# EAGLE board PCB v51 (EAGLE 9.7.0)
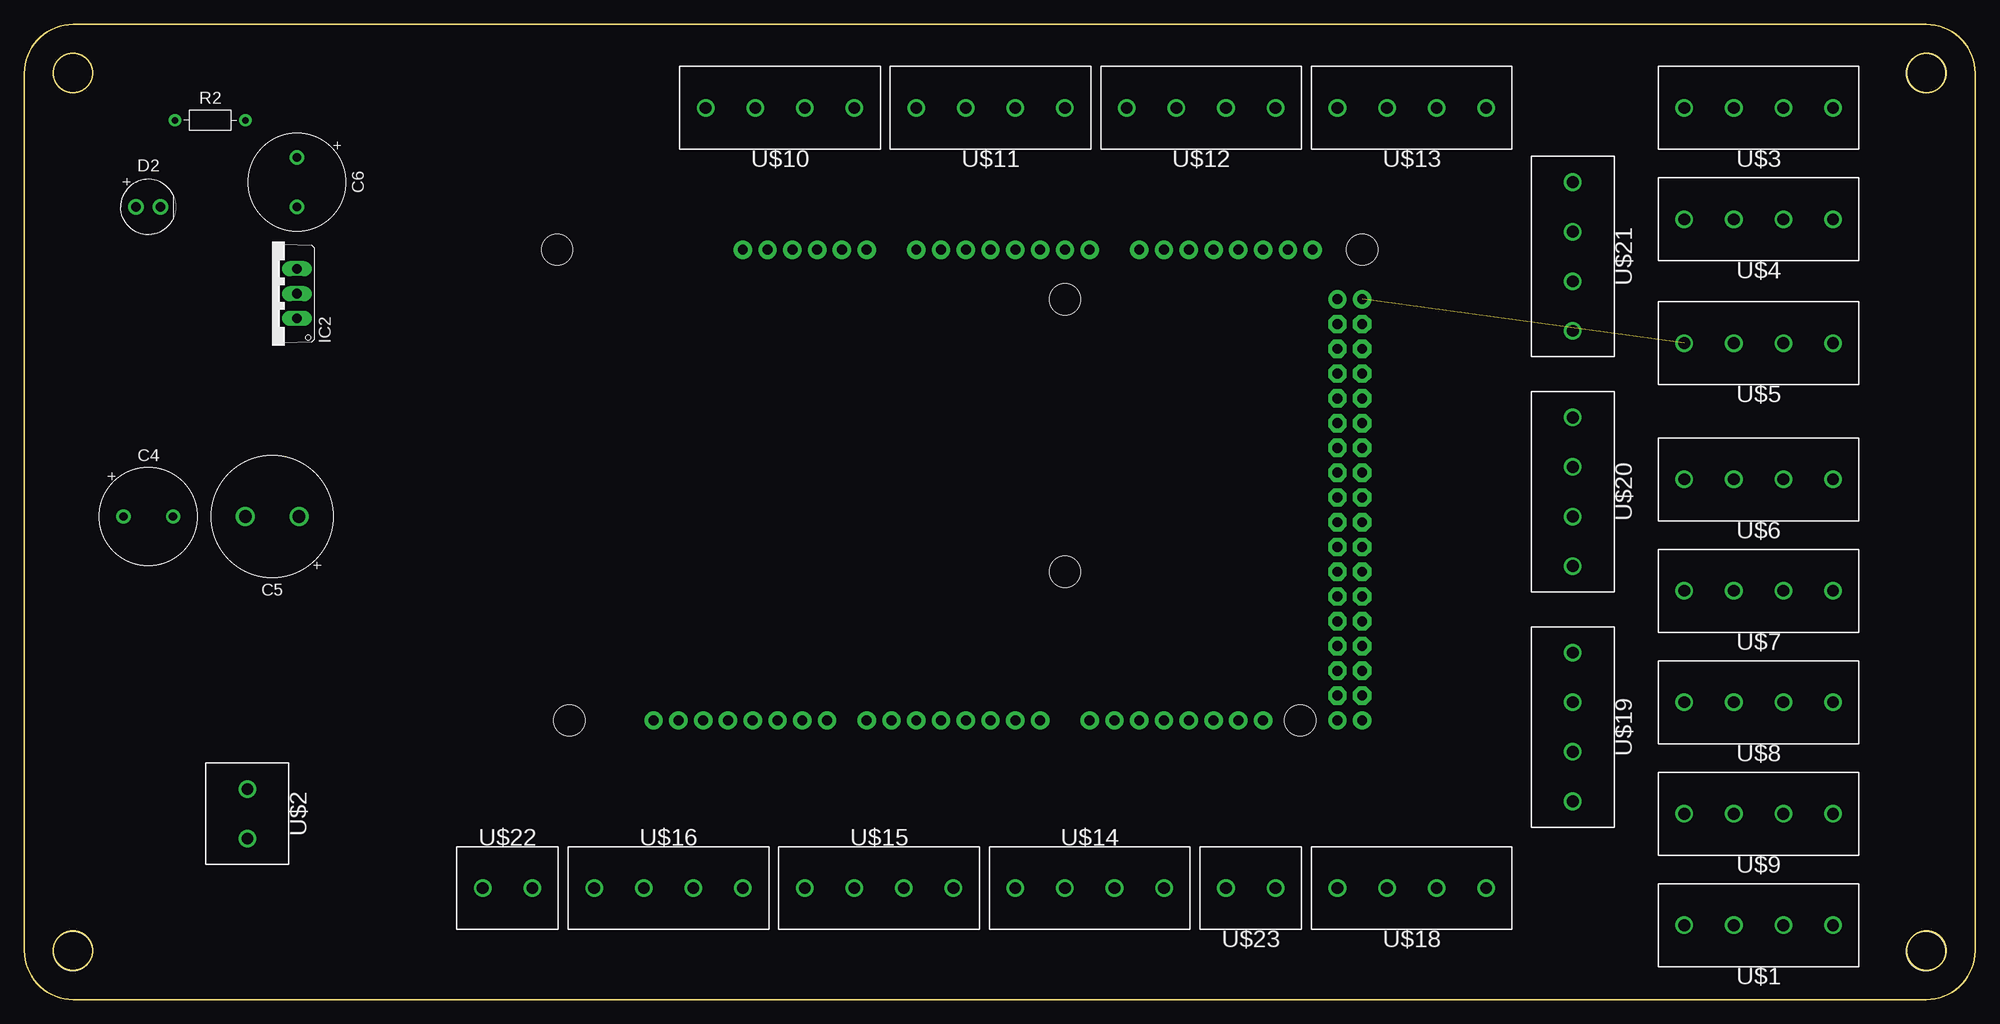
[diagram p0: board, top side]
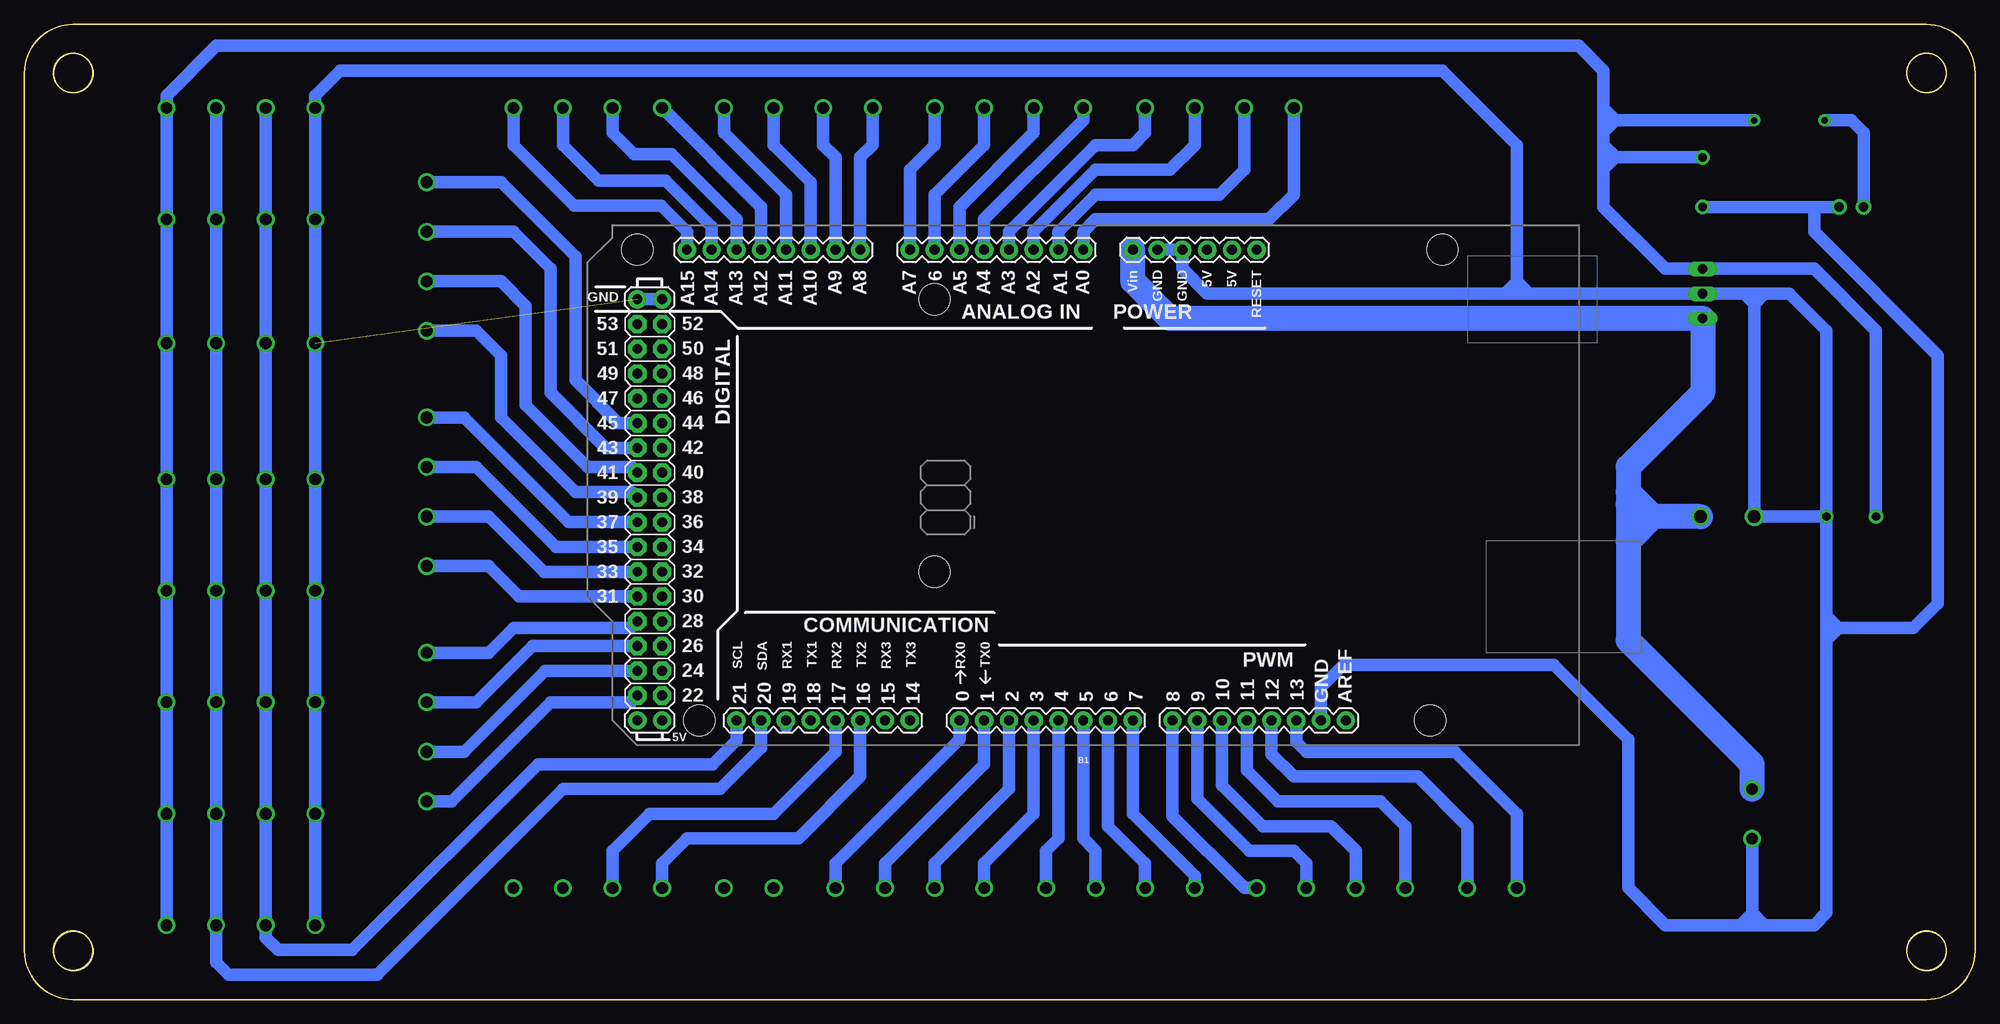
[diagram p1: board, bottom side, seen from below]

Size 200 x 100 mm. Coordinates in mm from the lower left corner, seen from the top.
Outline: 0,5 arc90 5,0 195,0 arc90 200,5 200,95 arc90 195,100 5,100 arc90 0,95 0,5
Outline: circle at 5,5 radius 2
Outline: circle at 195,95 radius 2
Outline: circle at 195,5 radius 2
Outline: circle at 5,95 radius 2
Copper layers (1*16): Top / Bottom
Stack-up Default Layer Stack: Top User Defined 0.035mm / Dielectric-1 User Defined 1.5mm / Bottom User Defined 0.035mm
Design rules "default": minimum track width 6mil, minimum drill 0.35mm, track to track 6mil, track to pad 6mil, pad to pad 6mil, via to via 6mil, smd to smd 6mil, copper to edge 40mil, drill to drill 6mil, minimum pad ring 10mil, minimum via ring 8mil, stop-mask expansion 4mil, vias tented up to drill 0mil, thermal gap 10mil
Holes 4 mm at 4.95,95 4.95,4.95 194.94,4.95 194.94,95

## Footprints (pad centres in the part's own frame; a part is rotated, then mirrored left to right if it is on the bottom)
ARDUINO_MEGA = drill 1.016 pad 1.88: 0 13.97,24.13; 1 11.43,24.13; 2 8.89,24.13; 3 6.35,24.13; 3.3V -13.97,-24.13; 4 3.81,24.13; 5 1.27,24.13; 5V@0 -11.43,-24.13; 5V@1 44.45,24.13; 5V@2 46.99,24.13; 6 -1.27,24.13; 7 -3.81,24.13; 8 -7.874,24.13; 9 -10.414,24.13; 10 -12.954,24.13; 11 -15.494,24.13; 12 -18.034,24.13; 13 -20.574,24.13; 14 19.05,24.13; 15 21.59,24.13; 16 24.13,24.13; 17 26.67,24.13; 18 29.21,24.13; 19 31.75,24.13; 20 34.29,24.13; 21 36.83,24.13; A0 1.27,-24.13; A1 3.81,-24.13; A2 6.35,-24.13; A3 8.89,-24.13; A4 11.43,-24.13; A5 13.97,-24.13; A6 16.51,-24.13; A7 19.05,-24.13; A8 24.13,-24.13; A9 26.67,-24.13; A10 29.21,-24.13; A11 31.75,-24.13; A12 34.29,-24.13; A13 36.83,-24.13; A14 39.37,-24.13; A15 41.91,-24.13; AREF -25.654,24.13; GND@0 -8.89,-24.13; GND@1 -6.35,-24.13; GND@2 44.45,-19.05; GND@3 46.99,-19.05; GND@4 -23.114,24.13; RESET -16.51,-24.13; VIN -3.81,-24.13 | drill 1.016 pad 1.88 octagon: 22 44.45,21.59; 23 46.99,21.59; 24 44.45,19.05; 25 46.99,19.05; 26 44.45,16.51; 27 46.99,16.51; 28 44.45,13.97; 29 46.99,13.97; 30 44.45,11.43; 31 46.99,11.43; 32 44.45,8.89; 33 46.99,8.89; 34 44.45,6.35; 35 46.99,6.35; 36 44.45,3.81; 37 46.99,3.81; 38 44.45,1.27; 39 46.99,1.27; 40 44.45,-1.27; 41 46.99,-1.27; 42 44.45,-3.81; 43 46.99,-3.81; 44 44.45,-6.35; 45 46.99,-6.35; 46 44.45,-8.89; 47 46.99,-8.89; 48 44.45,-11.43; 49 46.99,-11.43; 50 44.45,-13.97; 51 46.99,-13.97; 52 44.45,-16.51; 53 46.99,-16.51 | hole 3.2: -34.29,24.13; -35.56,-24.13; 16.51,8.89; 16.51,-19.05; 40.64,24.13; 46.99,-24.13
CAPPRD508W65D1000H1100B = drill 0.85 pad 1.45: 1 -2.54,0; 2 2.54,0
CAPPRD550W110D1250H2500B = drill 1.3 pad 1.95: 1 -2.75,0; 2 2.75,0
LEDRD254W60D565H860B_O = drill 0.981 pad 1.581: 1 -1.27,0; 2 1.27,0
TO220V = drill 1.016 long: 1 -2.54,-2.54; 2 0,-2.54; 3 2.54,-2.54
RESAD724W46L381D178B = drill 0.66 pad 1.26: 1 -3.62,0; 2 3.62,0
TERMBLK_508-4N = drill 1.2: 1 0,0; 2 5.08,0; 3 10.16,0; 4 15.24,0
TERMBLK_508-2N = drill 1.2: 1 0,0; 2 5.08,0

## Placement (x,y rotation side)
B1  ARDUINO_MEGA_R3FULL  [ARDUINO_MEGA]  90.17,52.76 180 bottom
C4  0.1uF  [CAPPRD508W65D1000H1100B]  12.7,49.53 0 top
C5  0.33uF  [CAPPRD550W110D1250H2500B]  25.4,49.53 180 top
C6  0.1uF  [CAPPRD508W65D1000H1100B]  27.94,83.82 270 top
D2  LED_ORANGE  [LEDRD254W60D565H860B_O]  12.7,81.28 0 top
IC2  7805TV  [TO220V]  25.4,72.39 90 top
R2  330  [RESAD724W46L381D178B]  19.05,90.17 0 top
U$1  2828XX-4282837-4  [TERMBLK_508-4N]  170.18,7.62 0 top
U$2  2828XX-2282837-2  [TERMBLK_508-2N]  22.86,16.51 90 top
U$3  2828XX-4282837-4  [TERMBLK_508-4N]  170.18,91.44 0 top
U$4  2828XX-4282837-4  [TERMBLK_508-4N]  170.18,80.01 0 top
U$5  2828XX-4282837-4  [TERMBLK_508-4N]  170.18,67.31 0 top
U$6  2828XX-4282837-4  [TERMBLK_508-4N]  170.18,53.34 0 top
U$7  2828XX-4282837-4  [TERMBLK_508-4N]  170.18,41.91 0 top
U$8  2828XX-4282837-4  [TERMBLK_508-4N]  170.18,30.48 0 top
U$9  2828XX-4282837-4  [TERMBLK_508-4N]  170.18,19.05 0 top
U$10  2828XX-4282837-4  [TERMBLK_508-4N]  69.85,91.44 0 top
U$11  2828XX-4282837-4  [TERMBLK_508-4N]  91.44,91.44 0 top
U$12  2828XX-4282837-4  [TERMBLK_508-4N]  113.03,91.44 0 top
U$13  2828XX-4282837-4  [TERMBLK_508-4N]  134.62,91.44 0 top
U$14  2828XX-4282837-4  [TERMBLK_508-4N]  116.84,11.43 180 top
U$15  2828XX-4282837-4  [TERMBLK_508-4N]  95.25,11.43 180 top
U$16  2828XX-4282837-4  [TERMBLK_508-4N]  73.66,11.43 180 top
U$18  2828XX-4282837-4  [TERMBLK_508-4N]  134.62,11.43 0 top
U$19  2828XX-4282837-4  [TERMBLK_508-4N]  158.75,20.32 90 top
U$20  2828XX-4282837-4  [TERMBLK_508-4N]  158.75,44.45 90 top
U$21  2828XX-4282837-4  [TERMBLK_508-4N]  158.75,68.58 90 top
U$22  2828XX-2282837-2  [TERMBLK_508-2N]  52.07,11.43 180 top
U$23  2828XX-2282837-2  [TERMBLK_508-2N]  123.19,11.43 0 top

## Library data of the parts
B1 = SparkFun-Boards
C4-C6 = Capacitor; CATEGORY: Capacitor
D2 = Tinkercad; CATEGORY: Opto-Electronic; SUB-CATEGORY: LED
IC2 = linear
R2 = Resistor; CATEGORY: Resistor; SUB-CATEGORY: Fixed
U$1 U$3-U$16 U$18-U$21 = Connector; CATEGORY: Connector; DESCRIPTION: TERM BLK 4P SIDE ENT 5.08mm PCB; MANUFACTURER: TE Connectivity; MPN: 282837-4; OPERATING_TEMPERATURE: 40°C to +105°C; PART_STATUS: Active; ROHS_COMPLIANCE: RoHS Compliant; SERIES: 283737; SUBCATEGORY: Terminal Block; TYPE: Side Wire Entry
U$2 = Connector; CATEGORY: Connector; DESCRIPTION: 2 Position Wire to Board Terminal Block Horizontal with Board 5.08 mm Through Hole; MANUFACTURER: TE Connectivity; MPN: 282837-2; OPERATING_TEMPERATURE: -40°C to +105°C; PART_STATUS: ACTIVE; ROHS_COMPLIANCE: RoHS Compliant; SERIES: 282837; SPICEPREFIX: B; SUBCATEGORY: Terminal Block; TYPE: Side Wire Entry
U$22 U$23 = Connector; CATEGORY: Connector; DESCRIPTION: 2 Position Wire to Board Terminal Block Horizontal with Board 5.08 mm Through Hole; MANUFACTURER: TE Connectivity; MPN: 282837-2; OPERATING_TEMPERATURE: -40°C to +105°C; PART_STATUS: ACTIVE; ROHS_COMPLIANCE: RoHS Compliant; SERIES: 282837; SUBCATEGORY: Terminal Block; TYPE: Side Wire Entry

## Nets
0: B1.0 U$14.1
1: B1.1 U$14.2
2: B1.2 U$14.3
3: B1.3 U$14.4
4: B1.4 U$15.1
5: B1.5 U$15.2
6: B1.6 U$15.3
7: B1.7 U$15.4
8: B1.8 U$16.1
9: B1.9 U$16.2
10: B1.10 U$16.3
11: B1.11 U$16.4
12: B1.12 U$22.1
13: B1.13 U$22.2
14: B1.14
15: B1.15
16: B1.16 U$18.1
17: B1.17 U$18.2
18: B1.18
19: B1.19
22: B1.22
23: B1.23 U$19.1
24: B1.24
25: B1.25 U$19.2
26: B1.26
27: B1.27 U$19.3
28: B1.28
29: B1.29 U$19.4
30: B1.30
31: B1.31 U$20.1
32: B1.32
33: B1.33 U$20.2
34: B1.34
35: B1.35 U$20.3
36: B1.36
37: B1.37 U$20.4
38: B1.38
39: B1.39 U$21.1
40: B1.40
41: B1.41 U$21.2
42: B1.42
43: B1.43 U$21.3
44: B1.44
45: B1.45 U$21.4
46: B1.46
47: B1.47
48: B1.48
49: B1.49
50: B1.50
51: B1.51
52: B1.52
53: B1.53
+5V: C4.1 C6.1 IC2.3 R2.2 U$1.4 U$3.4 U$4.4 U$5.4 U$6.4 U$7.4 U$8.4 U$9.4
+12V: B1.VIN C5.1 IC2.1 U$2.2
A0: B1.A0 U$10.1
A1: B1.A1 U$10.2
A2: B1.A2 U$10.3
A3: B1.A3 U$10.4
A4: B1.A4 U$11.1
A5: B1.A5 U$11.2
A6: B1.A6 U$11.3
A7: B1.A7 U$11.4
A8: B1.A8 U$12.1
A9: B1.A9 U$12.2
A10: B1.A10 U$12.3
A11: B1.A11 U$12.4
A12: B1.A12 U$13.1
A13: B1.A13 U$13.2
A14: B1.A14 U$13.3
A15: B1.A15 U$13.4
GND: B1.GND@0 B1.GND@1 B1.GND@2 B1.GND@3 B1.GND@4 C4.2 C5.2 C6.2 D2.2 IC2.2 U$1.1 U$2.1 U$3.1 U$4.1 U$5.1 U$6.1 U$7.1 U$8.1 U$9.1
N$1: D2.1 R2.1
SCL: B1.21 U$1.2 U$3.2 U$4.2 U$5.2 U$6.2 U$7.2 U$8.2 U$9.2
SDA: B1.20 U$1.3 U$3.3 U$4.3 U$5.3 U$6.3 U$7.3 U$8.3 U$9.3

## Tracks (layer width: path | path; a pad name or v marks a point on that pad's centre or on a via)
0
  Bottom 1.27: U$14.1 116.84,13.97 104.14,26.67 B1.0
1
  Bottom 1.27: U$14.2 111.76,13.97 101.6,24.13 B1.1
2
  Bottom 1.27: U$14.3 106.68,13.97 99.06,21.59 B1.2
3
  Bottom 1.27: U$14.4 101.6,13.97 96.52,19.05 B1.3
4
  Bottom 1.27: U$15.1 95.25,15.24 93.98,16.51 B1.4
5
  Bottom 1.27: U$15.2 90.17,15.24 91.44,16.51 B1.5
6
  Bottom 1.27: U$15.3 85.09,13.97 88.9,17.78 B1.6
7
  Bottom 1.27: U$15.4 80.01,12.7 86.36,19.05 B1.7
8
  Bottom 1.27: U$16.1 74.93,11.43 82.3,18.8 B1.8
9
  Bottom 1.27: U$16.2 68.58,13.97 69.85,15.24 74.42,15.24 79.76,20.57 B1.9
10
  Bottom 1.27: U$16.3 63.5,15.24 66.04,17.78 73.03,17.78 77.22,21.97 B1.10
11
  Bottom 1.27: U$16.4 58.42,17.78 60.96,20.32 71.5,20.32 74.68,23.5 B1.11
12
  Bottom 1.27: U$22.1 52.07,17.78 57.15,22.86 69.85,22.86 72.14,25.15 B1.12 72.39,28.37
13
  Bottom 1.27: B1.13 69.6,26.42 68.56,25.38 53.31,25.38 46.99,19.05 U$22.2
16
  Bottom 1.27: B1.16 114.3,22.86 120.65,16.51 132.08,16.51 134.62,13.97 U$18.1
17
  Bottom 1.27: 116.84,27.94 B1.17 116.84,25.4 123.19,19.05 135.89,19.05 139.7,15.24 U$18.2
19
  Bottom 1.27: 121.92,27.94 B1.19
23
  Bottom 1.27: B1.23 137.85,30.48 146.05,30.48 156.21,20.32 U$19.1
25
  Bottom 1.27: B1.25 146.63,33.71 154.94,25.4 U$19.2
27
  Bottom 1.27: B1.27 147.9,36.25 153.67,30.48 U$19.3
29
  Bottom 1.27: B1.29 137.85,38.1 149.86,38.1 152.4,35.56 U$19.4
31
  Bottom 1.27: B1.31 149.28,41.33 152.4,44.45 U$20.1
33
  Bottom 1.27: B1.33 146.74,43.87 152.4,49.53 U$20.2
35
  Bottom 1.27: B1.35 145.47,46.41 153.67,54.61 U$20.3
37
  Bottom 1.27: B1.37 144.2,48.95 154.94,59.69 U$20.4
39
  Bottom 1.27: B1.39 137.74,52.07 143.51,52.07 151.13,59.69 151.13,66.04 153.67,68.58 U$21.1
41
  Bottom 1.27: B1.41 137.74,54.61 142.24,54.61 148.59,60.96 148.59,71.12 151.13,73.66 U$21.2
43
  Bottom 1.27: B1.43 140.39,56.57 146.05,62.23 146.05,74.93 149.86,78.74 U$21.3
45
  Bottom 1.27: B1.45 139.12,59.11 143.51,63.5 143.51,76.2 151.13,83.82 U$21.4
+5V
  Bottom 1.27: U$1.4 U$9.4 U$8.4 U$7.4 U$6.4 U$5.4 U$4.4 U$3.4 185.42,92.71 180.34,97.79 40.64,97.79 38.1,95.25 38.1,91.44 | 38.1,85.09 38.1,81.28 31.75,74.93 IC2.3 16.51,74.93 10.16,68.58 C4.1 | 38.1,91.44 38.1,90.17 | 38.1,90.17 38.1,88.9 | 38.1,88.9 38.1,87.63 | C6.1 36.83,86.36 | 36.83,86.36 38.1,87.63 | 36.83,86.36 38.1,85.09 | 38.1,87.63 38.1,85.09 | R2.2 36.83,90.17 | 36.83,90.17 38.1,90.17 | 36.83,90.17 38.1,88.9 | 36.83,90.17 38.1,91.44
+12V
  Bottom 2.54: U$2.2 22.86,24.13 35.56,36.83 35.56,46.99 | 35.56,52.07 35.56,54.61 27.94,62.23 IC2.1 82.55,69.85 86.36,73.66 B1.VIN | 35.56,52.07 35.56,50.8 | 35.56,50.8 35.56,46.99 | C5.1 33.02,49.53 | 33.02,49.53 34.29,49.53 35.56,50.8 | 33.02,49.53 35.56,46.99 | 33.02,49.53 35.56,52.07
A0
  Bottom 1.27: B1.A0 91.44,78.74 90.17,80.01 72.39,80.01 69.85,82.55 U$10.1
A1
  Bottom 1.27: B1.A1 93.98,78.74 90.17,82.55 77.47,82.55 74.93,85.09 U$10.2
A2
  Bottom 1.27: U$10.3 80.01,87.63 82.55,85.09 90.17,85.09 96.52,78.74 B1.A2
A3
  Bottom 1.27: U$10.4 85.09,88.9 86.36,87.63 90.17,87.63 99.06,78.74 B1.A3
A4
  Bottom 1.27: U$11.1 91.44,90.17 101.6,80.01 B1.A4
A5
  Bottom 1.27: U$11.2 96.52,88.9 104.14,81.28 B1.A5
A6
  Bottom 1.27: U$11.3 101.6,87.63 106.68,82.55 B1.A6
A7
  Bottom 1.27: U$11.4 106.68,87.63 109.22,85.09 B1.A7
A8
  Bottom 1.27: U$12.1 113.03,87.63 114.3,86.36 B1.A8
A9
  Bottom 1.27: B1.A9 116.84,86.36 118.11,87.63 U$12.2
A10
  Bottom 1.27: B1.A10 119.38,83.82 123.19,87.63 U$12.3
A11
  Bottom 1.27: B1.A11 121.92,82.55 128.27,88.9 U$12.4
A12
  Bottom 1.27: B1.A12 124.46,81.28 U$13.1
A13
  Bottom 1.27: B1.A13 127,80.01 133.66,86.67 137.47,86.67 139.7,88.9 U$13.2
A14
  Bottom 1.27: B1.A14 129.54,79.25 134.26,83.97 141.12,83.97 144.78,87.63 U$13.3
A15
  Bottom 1.27: B1.A15 132.08,78.74 134.75,81.41 143.64,81.41 149.86,87.63 U$13.4
GND  (1 unrouted)
  Bottom 1.27: U$1.1 U$9.1 U$8.1 U$7.1 U$6.1 U$5.1 U$4.1 U$3.1 170.18,92.71 167.64,95.25 54.61,95.25 46.99,87.63 46.99,73.66 | B1.GND@1 B1.GND@0 81.28,74.93 78.74,72.39 48.26,72.39 | C6.2 16.51,81.28 | 16.51,81.28 D2.2 | 23.71,72.39 IC2.2 45.72,72.39 | 23.71,72.39 22.86,72.39 | 22.86,72.39 21.59,72.39 | 21.59,72.39 19.05,72.39 15.24,68.58 C4.2 | 15.24,36.83 15.24,8.89 16.51,7.62 21.59,7.62 | C4.2 C5.2 22.65,71.33 | 22.65,71.33 22.65,72.18 22.86,72.39 | 21.59,72.39 22.65,71.33 | 22.65,71.33 23.71,72.39 | B1.GND@4 67.06,32 64.77,34.29 43.18,34.29 35.56,26.67 35.56,11.43 31.75,7.62 24.13,7.62 | 21.59,7.62 22.86,7.62 | 22.86,7.62 24.13,7.62 | U$2.1 22.86,8.89 | 22.86,8.89 22.86,7.62 | 22.86,8.89 21.59,7.62 | 22.86,8.89 24.13,7.62 | 45.72,72.39 46.99,72.39 | 46.99,72.39 48.26,72.39 | 46.99,73.66 46.99,72.39 | 46.99,73.66 45.72,72.39 | 46.99,73.66 48.26,72.39 | 16.51,81.28 16.51,78.74 3.81,66.04 3.81,40.64 6.35,38.1 13.97,38.1 | 15.24,39.37 C4.2 | 15.24,39.37 13.97,38.1 | 13.97,38.1 15.24,36.83 | 15.24,39.37 15.24,36.83 | B1.GND@2 B1.GND@3
N$1
  Bottom 1.27: D2.1 11.43,88.9 12.7,90.17 R2.1
SCL
  Bottom 1.27: U$3.2 U$4.2 U$5.2 U$6.2 U$7.2 U$8.2 U$9.2 U$1.2 175.26,6.35 173.99,5.08 166.37,5.08 147.34,24.11 129.46,24.11 127,26.57 B1.21
SDA
  Bottom 1.27: U$3.3 U$4.3 U$5.3 U$6.3 U$7.3 U$8.3 U$9.3 U$1.3 180.34,3.81 179.07,2.54 163.83,2.54 144.78,21.59 128.7,21.59 124.46,25.83 B1.20